# Altium PCB PH10EA2332-1.PcbDoc
Units mm, origin at the board's own origin, x right, y up, seen from the top; angles counter-clockwise.
Board outline 32 x 23 mm, 2 copper layers (Top Layer, Bottom Layer), stack 1.001 mm thick; 25 components, 20 nets, 77 pads, 766 vias.
Unrouted connection lines stored in the file: 2.
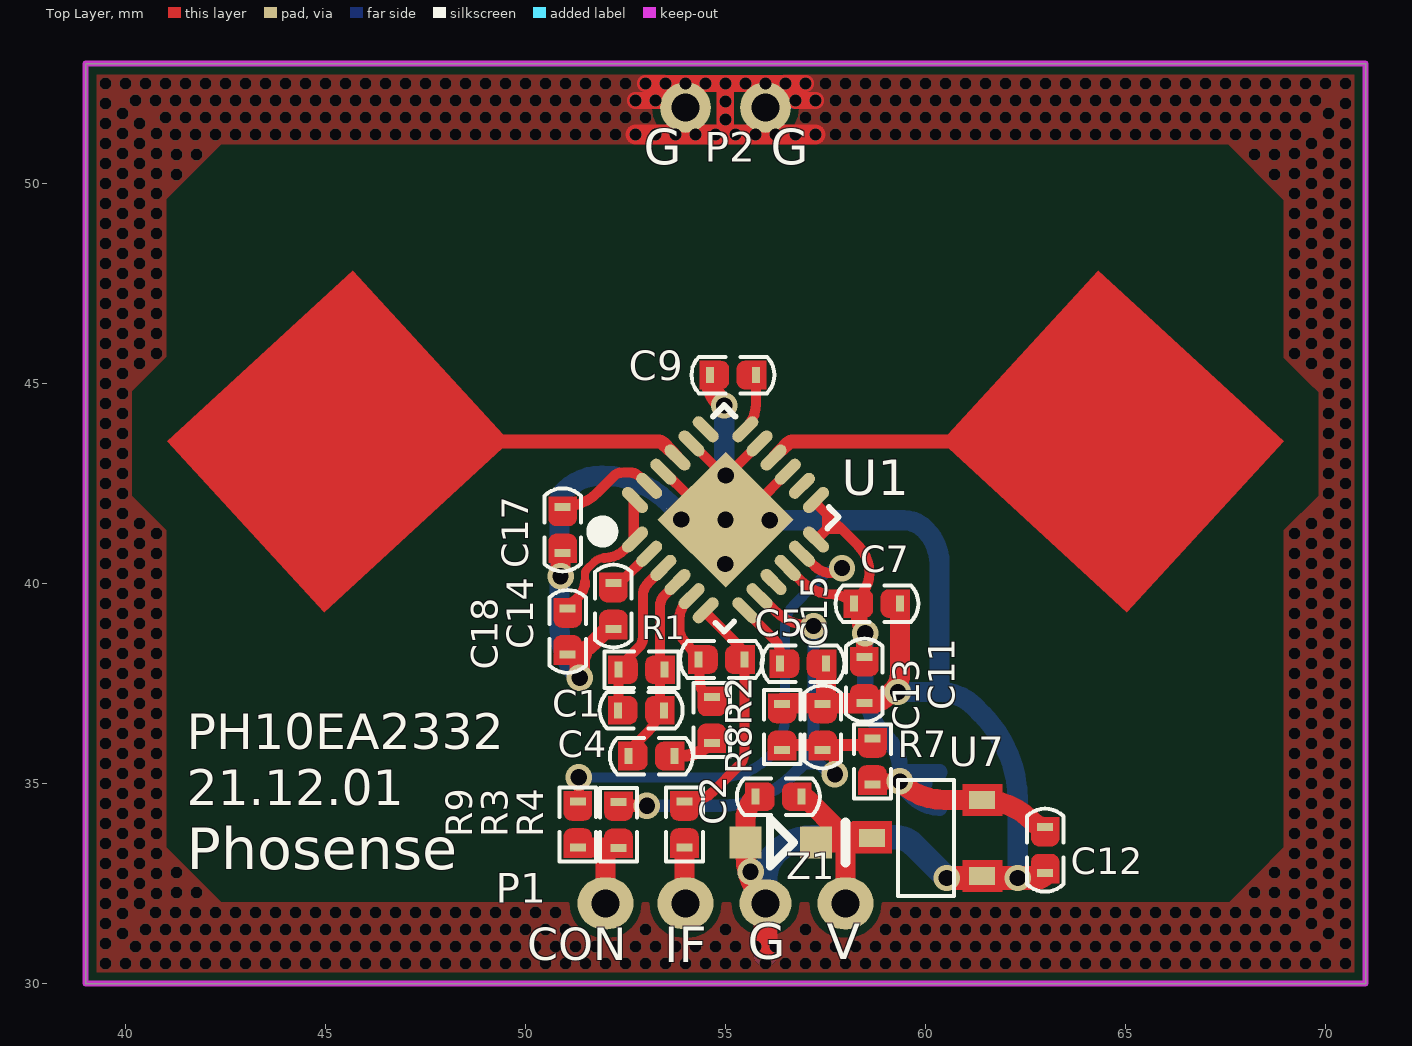
[diagram p0: Top Layer view]
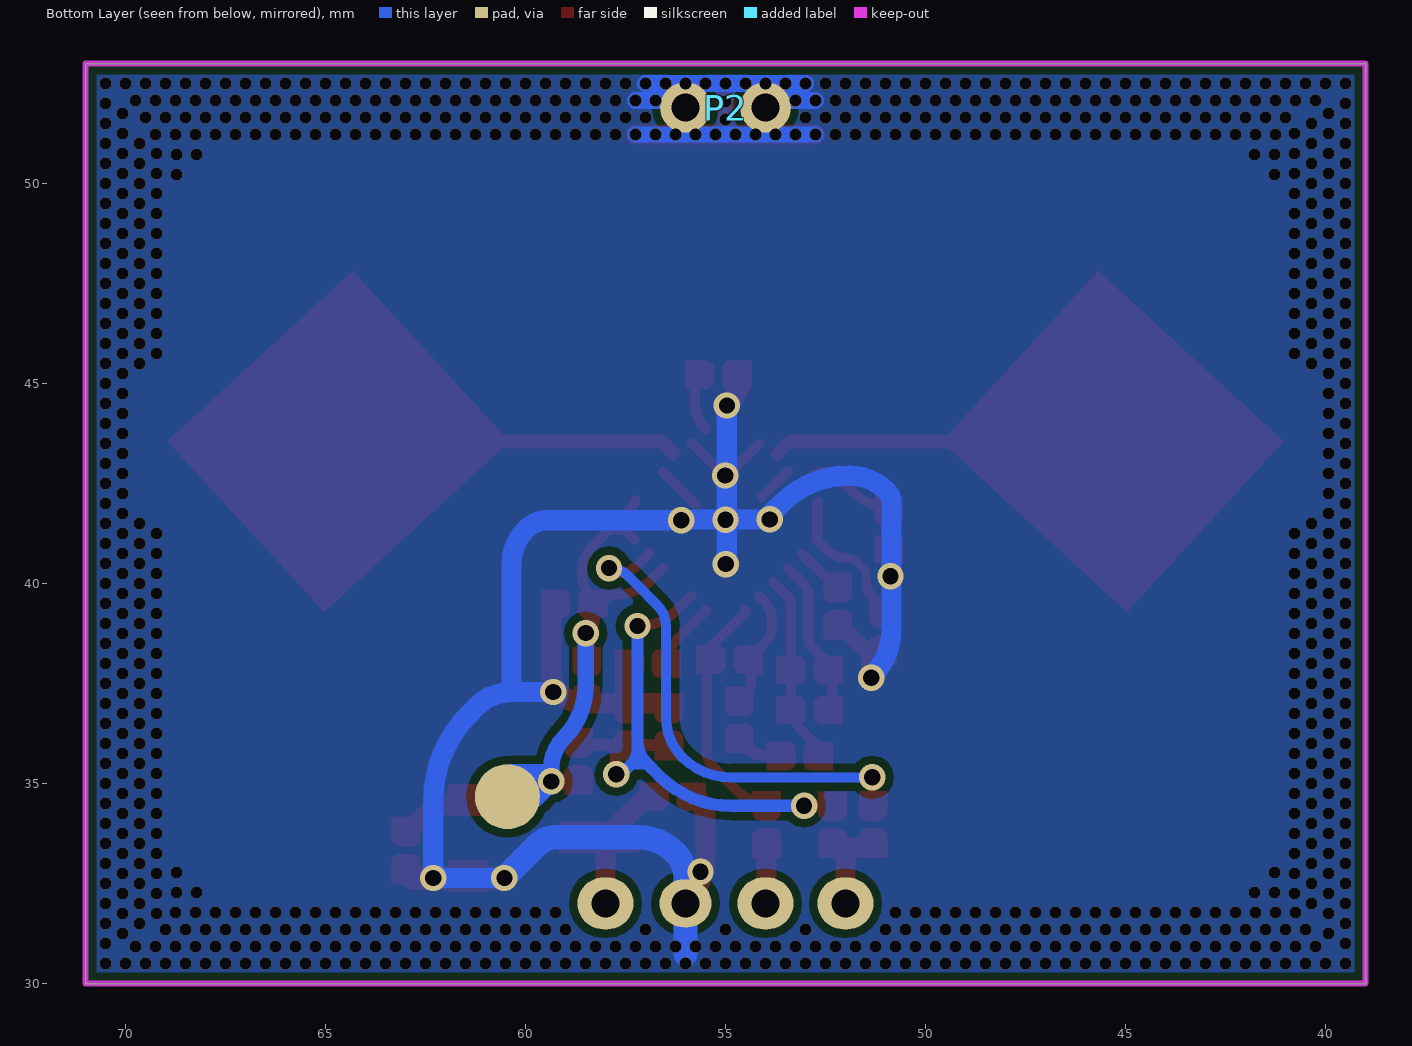
[diagram p1: Bottom Layer view, seen from below]

## Layer stack, top to bottom
Top Layer: signal copper 0.0356
Dielectric: core 0.93, FR-4, Dk 4.8
Bottom Layer: signal copper 0.0356

## Board outline
39,30 39,53 71,53 71,30

## Design rules (kind name [scope] priority, off if disabled: settings)
Clearance [All] p1: gap=0.203
ComponentClearance [All] p1: gap=0.254 collisioncheckmode=3 verticalgap=0.254
PolygonConnect [All] p1: connectstyle=Direct reliefconductorwidth=0.254 reliefentries=4 polygonreliefangle="90 Angle"
RoutingVias [All] p1: holewidth=0.711 width=1.27 viastyle="Through Hole" minholewidth=0.711 minwidth=1.27 maxholewidth=0.711 maxwidth=1.27
SolderMaskExpansion [All] p1: expansion=0.102
TestPointUsage [All] p1: valid=0 allowmultiple=FALSE
Testpoint [All] p1: side=15 testpointundercomponent=TRUE minsize=1.016 maxsize=2.54 preferedsize=1.524 minholesize=0 maxholesize=1.016 preferedholesize=0.813 testpointgrid=0.025 style=1023 order=0-112345678
Width [All] p1: maxlimit=1.016 minlimit=0.254 preferedwidth=0.254 minimp=50.000000 maximp=50.000000 favimp=50.000000
18 further rules are at their usual default settings.

## Components (designator, comment, footprint, x,y, rotation, side; value= is the part's Value field where it differs from the comment)
C1 "5nF" C0402 53.467,36.83 r180 top (schematic designator C16)
C2 "10uF" C0402 56.896,34.671 r180 top (schematic designator C16)
C4 "10uF" C0402 53.721,35.687 r180 top (schematic designator C16)
C5 "5nF" C0402 55.474,38.1 r180 top (schematic designator C16)
C7 "100nF" C0402 59.36,39.497 r180 top (schematic designator C16)
C9 "10uF" C0402 54.61,45.212 r0 top (schematic designator C16)
C11 "10uF" C0402 58.471,37.008 r90 top (schematic designator C16)
C12 "10uF" C0402 62.992,33.909 r270 top (schematic designator C16)
C13 "10uF" C0402 57.429,35.839 r90 top (schematic designator C16)
C14 "10uF" C0402 52.197,38.862 r90 top (schematic designator C16)
C15 "10uF" C0402 56.363,37.998 r0 top (schematic designator C16)
C17 "10uF" C0402 50.927,40.767 r90 top (schematic designator C16)
C18 "100pF" C0402 51.054,38.227 r90 top (schematic designator C16)
P1 "PH2.0-4P" PH2.0-5P 58,32.004 r180 top
P2 "SIP2.0-2P" SIP2.0-2P 56,51.9 r180 bottom (schematic designator P1)
R1 "100k" R0402 52.324,37.846 r0 top (schematic designator R14)
R2 "5.1k" R0402 54.661,36.017 r90 top (schematic designator R14)
R3 "NC" R0402 52.324,34.544 r270 top (schematic designator R14)
R4 "1k" R0402 53.975,33.401 r90 top (schematic designator R14)
R7 "12k" R0402 58.674,34.976 r90 top (schematic designator R14)
R8 "10k" R0402 56.413,35.839 r90 top (schematic designator R14)
R9 "0" R0402 51.308,33.401 r90 top (schematic designator R14)
U1 "XBR8161" QFN24 56.556,42.866 r45 top (schematic designator QFN-1)
U7 "ME6216A33M3G" SOT-23-L 61.417,32.69 r180 top (schematic designator U6)
Z1 "ESD5Z5.0T1G" SOD-523 55.499,33.528 r0 top

## Footprints (in the part's own frame and the unit in brackets; to place one, negate y for a bottom-side part, rotate by r counter-clockwise, add the part's x,y. Pads: shape width x height; smd on the part's side, far side on the other; paste and mask are expansions set on the pad)
C0402 [mm]
  rect 0.2x0.4 smd: 1(0,0) 2(1.15,0)
  Top Layer region: 0.873,0.352 0.873,-0.351 1.401,-0.351 1.401,0.352
  Top Layer region: -0.252,0.352 -0.252,-0.351 0.276,-0.351 0.353,-0.336 0.418,-0.292 0.461,-0.227 0.477,-0.151 0.477,-0.151 0.477,0.152 0.461,0.228 0.418,0.293 0.353,0.337 0.276,0.352 0.276,0.352
  Top Layer region: 1.402,-0.352 1.402,0.351 0.874,0.351 0.797,0.336 0.732,0.292 0.689,0.227 0.673,0.151 0.673,0.151 0.673,-0.152 0.689,-0.228 0.732,-0.293 0.797,-0.337 0.874,-0.352 0.874,-0.352
  silkscreen extent -0.46,-0.46 1.61,0.46, body extent 0.08,-0.3 1.08,0.3, height 0.2
PH2.0-5P [mm]
  oval 1.402x1.302 hole 0.7: 1(0,0) 3(4,0)
  oval 1.3x1.2 hole 0.7: 2(2,0)
  oval 1.402x1.3 hole 0.7: 4(6,0)
QFN24 [mm]
  oval 0.8x0.3 smd: 1(-3.95,1.45) 2(-3.95,0.95) 3(-3.95,0.45) 4(-3.95,-0.05) 5(-3.95,-0.55) 6(-3.95,-1.05) 13(-0.05,-1.05) 14(-0.05,-0.55) 15(-0.05,-0.05) 16(-0.05,0.45) 17(-0.05,0.95) 18(-0.05,1.45)
  oval 0.3x0.8 smd: 7(-3.25,-1.75) 8(-2.75,-1.75) 9(-2.25,-1.75) 10(-1.75,-1.75) 11(-1.25,-1.75) 12(-0.75,-1.75) 19(-0.75,2.15) 20(-1.25,2.15) 21(-1.75,2.15) 22(-2.25,2.15) 23(-2.75,2.15) 24(-3.25,2.15)
  rect 2.4x2.4 smd: 25(-2,0.2)
  silkscreen extent -4.59,-1.75 0.05,2.37
R0402 [mm]
  rect 0.2x0.4 smd: 1(0,0) 2(1.15,0)
  Top Layer region: 0.873,0.352 0.873,-0.351 1.401,-0.351 1.401,0.352
  Top Layer region: -0.252,0.352 -0.252,-0.351 0.276,-0.351 0.353,-0.336 0.418,-0.292 0.461,-0.227 0.477,-0.151 0.477,-0.151 0.477,0.152 0.461,0.228 0.418,0.293 0.353,0.337 0.276,0.352 0.276,0.352
  Top Layer region: 1.402,-0.352 1.402,0.351 0.874,0.351 0.797,0.336 0.732,0.292 0.689,0.227 0.673,0.151 0.673,0.151 0.673,-0.152 0.689,-0.228 0.732,-0.293 0.797,-0.337 0.874,-0.352 0.874,-0.352
  silkscreen extent -0.35,-0.46 1.5,0.46, body extent 0.12,-0.26 1.12,0.24, height 0.35
SIP2.0-2P [mm]
  round 1.27 hole 0.7: 1(0,0) 2(2,0)
SOD-523 [mm]
  rect 0.8x0.8 smd: A(0,0) K(1.76,0)
  silkscreen extent 0.62,-0.6 2.5,0.6, body extent -0.47,-0.63 2.23,0.62, height 1.1
SOT-23-L [mm]
  rect 0.65x0.45 smd: 1(0,0) 2(0,-1.9) 3(2.757,-0.95)
  Top Layer region: -0.507,-0.398 0.496,-0.398 0.496,0.405 -0.507,0.405
  Top Layer region: -0.507,-2.303 0.496,-2.303 0.496,-1.5 -0.507,-1.5
  Top Layer region: 2.254,-1.367 3.257,-1.367 3.257,-0.564 2.254,-0.564
  silkscreen extent 0.71,-2.4 2.11,0.5, body extent 0.17,-2.44 2.67,0.56, height 1.05

## Part data
C1 C2 C4 C5 C7 C9 C11 C12 C13 C14 C15 C17 C18: library part Cap, "Capacitor"
P1: library part CON5, "Connector"
P2: library part "Header 2", "Header, 2-Pin"
R1 R2 R3 R4 R7 R8 R9: library part Res2, "Resistor"
U1: library part XBR1000
U7: library part SSP6206
Z1: library part "D Zener", "Zener Diode"

## Free pads (board coordinates)
  round 1.626 smd far side: 0(60.452,34.671)

## Via types
v1: diameter 0.3, hole 0.3, Top Layer to Bottom Layer, tented both sides, 747 vias
v2: diameter 0.66, hole 0.406, Top Layer to Bottom Layer, tented both sides, 19 vias

## Nets (pads, with @x,y where several pads share a name; then routed paths per layer and width w, separated by ;. In a path a pad name is that pad's centre, name@x,y a point inside that pad or via, vN(x,y) a via of type N, cw(c..) or ccw(c..) an arc to the next point about the centre after c; other vN are vias at no path point)
3.3V: C7.2 C11.2 C12.1 pad.0 R7.1 U1.10 U1.12 U1.13 U7.2 | length 19.2
  Top Layer w0.254: U1.10 cw(c56.556,40.379) 56.564,40.387 56.885,40.067 ccw(c57.709,40.891) 57.709,39.726 cw(c57.709,39.191) 58.087,39.569 ; U1.12 ccw(c57.263,41.124) 57.281,41.106 57.719,41.544 ; U1.13 ccw(c57.474,42.088) 57.325,41.939 58.31,40.953 cw(c57.617,40.259) 58.598,40.259 cw(c57.818,40.259) 58.369,39.707 ; 57.533,41.73 cw(c57.524,41.72) 57.537,41.72 57.537,41.362 57.9,41.362 ; 57.9,41.362 cw(c57.9,41.36) 57.902,41.361 ccw(c57.9,41.36) 57.9,41.362
  Top Layer w0.305: 58.344,39.37 58.344,39.646 ; 58.344,39.646 cw(c58.431,39.646) 58.369,39.707 ccw(c58.431,39.646) 58.344,39.646
  Top Layer w0.406: 58.344,39.37 58.344,39.128 ccw(c58.864,39.128) v2(58.496,38.76) ccw(c58.558,38.699) 58.471,38.699 C11.2 ; R7.1 cw(c58.858,34.792) 58.858,35.052 v2(59.36,35.052)
  Top Layer w0.508: v2(59.36,35.052) ccw(c60.476,36.168) 60.476,34.59 U7.2 cw(c61.417,32.861) 62.64,34.083 62.688,34.035 ccw(c62.992,34.338) C12.1
  Bottom Layer w0.406: v2(58.496,38.76) 58.496,37.455 ccw(c60.367,37.455) 59.044,36.133 cw(c58.282,35.37) v2@59.36,35.37 ; v2@59.393,35.281 pad.0@60.35,35.281 ; v2@59.393,35.357 cw(c59.393,35.403) v2@59.36,35.37 ; pad.0@59.969,35.001 ccw(c59.847,34.879) 59.847,35.052 v2(59.36,35.052) ; pad.0@60.35,34.395 cw(c60.35,35.334) 59.687,34.67 59.398,34.959 cw(c59.492,35.052) v2(59.36,35.052) ; v2(59.36,35.052) v2@59.36,35.37
3.6~5V: C2.1 P1.1 U7.3 Z1.K | length 5.4
  Top Layer w0.508: C2.1 cw(c56.896,34.487) 57.026,34.617 57.855,33.788 ; Z1.K 58.39,33.528 ccw(c58.39,33.91) U7.3 ccw(c58.302,33.282) 58.302,33.788 57.855,33.788 ; 57.937,33.528 cw(c57.786,33.377) 58,33.377 P1.1 ; 57.963,33.528 ccw(c57.595,33.528) 57.855,33.788
GND: C2.2 C7.1 C9.1 C11.1 C12.2 C13.2 C14.1 C15.2 C17.1 C18.1 R8.2 U1.15 U1.17 U1.20 U1.22 U1.25 U7.1 Z1.A | length 58.7
  Top Layer w0.254: U1.22 53.471,42.795 U1.25@54.102,42.164 ; U1.20 54.161,43.502 U1.25@54.962,42.701 ; U1.25@55.045,42.701 55.847,43.502 U1.17 ; U1.25@55.728,41.961 56.556,42.789 U1.15
  Top Layer w0.406: C18.1@51.003,38.227 ccw(c51.003,39.212) 51.7,38.516 52.046,38.862 C14.1
  Top Layer w0.508: v2(50.876,40.183) 50.876,40.644 cw(c51.05,40.644) C17.1 ; v2(51.359,37.643) 51.359,38.122 cw(c51.524,38.122) 51.407,38.239 ; C9.1 ccw(c55.591,45.212) 54.897,44.518 v2(54.966,44.45) ; C2.2 ccw(c56.342,34.075) 55.499,34.075 Z1.A 55.499,33.214 ccw(c57.21,33.214) 56,32.004 ; R8.2@56.363,36.989 cw(c56.407,36.945) 56.407,37.008 58.59,37.008 ccw(c58.59,37.702) 59.08,37.211 59.183,37.314 ccw(c58.757,37.74) 59.36,37.74 C7.1 ; C15.2 57.513,37.052 ccw(c57.575,37.052) C13.2@57.531,37.008
  Top Layer w0.61: 55.968,32.036 56,32.004 56,31.005 ccw(c56.024,31.005) 56.007,30.988 ; v2(60.528,32.639) 62.702,32.639 ccw(c62.702,33.049) C12.2
  Bottom Layer w0.508: v2(51.359,37.643) cw(c52.585,38.869) 50.851,38.869 50.851,42.01 cw(c51.284,42.01) 50.978,42.316 cw(c51.898,41.397) 51.898,42.697 51.918,42.697 cw(c51.918,40.306) 53.609,41.997 53.813,41.793 cw(c53.622,41.602) v2(53.892,41.602) 56.066,41.602 cw(c56.066,41.543) v2(56.108,41.584) 59.442,41.584 cw(c59.442,40.814) 59.987,41.359 cw(c59.111,40.482) 60.35,40.482 60.35,37.338 ; v2(54.966,44.45) 54.966,40.547 ccw(c55.053,40.547) v2(54.991,40.485) ; v2(59.309,37.287) 60.35,37.287 cw(c60.35,36.061) 61.218,36.928 61.408,36.737 cw(c59.24,34.569) 62.306,34.569 v2(62.306,32.639) v2(60.528,32.639)
  Bottom Layer w0.61: 56,30.734 56,32.644 cw(c56.891,32.644) 56.261,33.274 cw(c57.181,32.354) 57.181,33.655 59.258,33.655 cw(c59.258,33.042) 59.692,33.475 v2(60.528,32.639)
  other v1: 39.5,30.5 40,30.5 40.5,30.5 41,30.5 41.5,30.5 42,30.5 42.5,30.5 43,30.5 43.5,30.5 44,30.5 44.5,30.5 45,30.5 45.5,30.5 46,30.5 46.5,30.5 47,30.5 47.5,30.5 48,30.5 48.5,30.5 49,30.5 49.5,30.5 50,30.5 50.5,30.5 51,30.5 51.5,30.5 52,30.5 52.5,30.5 53,30.5 53.5,30.5 54,30.5 54.5,30.5 55,30.5 55.5,30.5 56,30.5 56.5,30.5 57,30.5 57.5,30.5 58,30.5 58.5,30.5 59,30.5 59.5,30.5 60,30.5 60.5,30.5 61,30.5 61.5,30.5 62,30.5 62.5,30.5 63,30.5 63.5,30.5 64,30.5 64.5,30.5 65,30.5 65.5,30.5 66,30.5 66.5,30.5 67,30.5 67.5,30.5 68,30.5 68.5,30.5 69,30.5 69.5,30.5 70,30.5 70.5,30.5 40.25,30.925 40.75,30.925 41.25,30.925 41.75,30.925 42.25,30.925 42.75,30.925 43.25,30.925 43.75,30.925 44.25,30.925 44.75,30.925 45.25,30.925 45.75,30.925 46.25,30.925 46.75,30.925 47.25,30.925 47.75,30.925 48.25,30.925 48.75,30.925 49.25,30.925 49.75,30.925 50.25,30.925 50.75,30.925 51.25,30.925 51.75,30.925 52.25,30.925 52.75,30.925 53.25,30.925 53.75,30.925 54.25,30.925 54.75,30.925 55.25,30.925 55.75,30.925 56.25,30.925 56.75,30.925 57.25,30.925 57.75,30.925 58.25,30.925 58.75,30.925 59.25,30.925 59.75,30.925 60.25,30.925 60.75,30.925 61.25,30.925 61.75,30.925 62.25,30.925 62.75,30.925 63.25,30.925 63.75,30.925 64.25,30.925 64.75,30.925 65.25,30.925 65.75,30.925 66.25,30.925 66.75,30.925 67.25,30.925 67.75,30.925 68.25,30.925 68.75,30.925 69.25,30.925 69.75,30.925 39.5,31 70.5,31 39.925,31.25 70.075,31.25 40.5,31.35 41,31.35 41.5,31.35 42,31.35 42.5,31.35 43,31.35 43.5,31.35 44,31.35 44.5,31.35 45,31.35 45.5,31.35 46,31.35 46.5,31.35 47,31.35 47.5,31.35 48,31.35 48.5,31.35 49,31.35 49.5,31.35 50,31.35 50.5,31.35 51,31.35 53,31.35 55,31.35 57,31.35 59,31.35 59.5,31.35 60,31.35 60.5,31.35 61,31.35 61.5,31.35 62,31.35 62.5,31.35 63,31.35 63.5,31.35 64,31.35 64.5,31.35 65,31.35 65.5,31.35 66,31.35 66.5,31.35 67,31.35 67.5,31.35 68,31.35 68.5,31.35 69,31.35 39.5,31.5 69.65,31.5 70.5,31.5 39.925,31.75 69.225,31.75 70.075,31.75 40.75,31.775 41.25,31.775 41.75,31.775 42.25,31.775 42.75,31.775 43.25,31.775 43.75,31.775 44.25,31.775 44.75,31.775 45.25,31.775 45.75,31.775 46.25,31.775 46.75,31.775 47.25,31.775 47.75,31.775 48.25,31.775 48.75,31.775 49.25,31.775 49.75,31.775 50.25,31.775 50.75,31.775 59.25,31.775 59.75,31.775 60.25,31.775 60.75,31.775 61.25,31.775 61.75,31.775 62.25,31.775 62.75,31.775 63.25,31.775 63.75,31.775 64.25,31.775 64.75,31.775 65.25,31.775 65.75,31.775 66.25,31.775 66.75,31.775 67.25,31.775 67.75,31.775 68.25,31.775 68.75,31.775 39.5,32 40.35,32 69.65,32 70.5,32 39.925,32.25 40.775,32.25 69.225,32.25 70.075,32.25 41.275,32.275 41.775,32.275 68.225,32.275 68.725,32.275 39.5,32.5 40.35,32.5 69.65,32.5 70.5,32.5 39.925,32.75 40.775,32.75 69.225,32.75 70.075,32.75 41.275,32.775 68.725,32.775 39.5,33 40.35,33 69.65,33 70.5,33 39.925,33.25 40.775,33.25 69.225,33.25 70.075,33.25 39.5,33.5 40.35,33.5 69.65,33.5 70.5,33.5 39.925,33.75 40.775,33.75 69.225,33.75 70.075,33.75 39.5,34 40.35,34 69.65,34 70.5,34 39.925,34.25 40.775,34.25 69.225,34.25 70.075,34.25 39.5,34.5 40.35,34.5 69.65,34.5 70.5,34.5 39.925,34.75 40.775,34.75 69.225,34.75 70.075,34.75 39.5,35 40.35,35 69.65,35 70.5,35 39.925,35.25 40.775,35.25 69.225,35.25 70.075,35.25 39.5,35.5 40.35,35.5 69.65,35.5 70.5,35.5 39.925,35.75 40.775,35.75 69.225,35.75 70.075,35.75 39.5,36 40.35,36 69.65,36 70.5,36 39.925,36.25 40.775,36.25 69.225,36.25 70.075,36.25 39.5,36.5 40.35,36.5 69.65,36.5 70.5,36.5 39.925,36.75 40.775,36.75 69.225,36.75 70.075,36.75 39.5,37 40.35,37 69.65,37 70.5,37 39.925,37.25 40.775,37.25 69.225,37.25 70.075,37.25 39.5,37.5 40.35,37.5 69.65,37.5 70.5,37.5 39.925,37.75 40.775,37.75 69.225,37.75 70.075,37.75 39.5,38 40.35,38 69.65,38 70.5,38 39.925,38.25 40.775,38.25 69.225,38.25 70.075,38.25 39.5,38.5 40.35,38.5 69.65,38.5 70.5,38.5 39.925,38.75 40.775,38.75 69.225,38.75 70.075,38.75 39.5,39 40.35,39 69.65,39 70.5,39 39.925,39.25 40.775,39.25 69.225,39.25 70.075,39.25 39.5,39.5 40.35,39.5 69.65,39.5 70.5,39.5 39.925,39.75 40.775,39.75 69.225,39.75 70.075,39.75 39.5,40 40.35,40 69.65,40 70.5,40 39.925,40.25 40.775,40.25 69.225,40.25 70.075,40.25 39.5,40.5 40.35,40.5 69.65,40.5 70.5,40.5 39.925,40.75 40.775,40.75 69.225,40.75 70.075,40.75 39.5,41 40.35,41 69.65,41 70.5,41 39.925,41.25 40.775,41.25 69.225,41.25 70.075,41.25 39.5,41.5 40.35,41.5 69.65,41.5 70.5,41.5 39.925,41.75 70.075,41.75 39.5,42 70.5,42 39.925,42.25 70.075,42.25 39.5,42.5 70.5,42.5 39.925,42.75 70.075,42.75 39.5,43 70.5,43 39.925,43.25 70.075,43.25 39.5,43.5 70.5,43.5 39.925,43.75 70.075,43.75 39.5,44 70.5,44 39.925,44.25 70.075,44.25 39.5,44.5 70.5,44.5 39.925,44.75 70.075,44.75 39.5,45 70.5,45 39.925,45.25 70.075,45.25 39.5,45.5 40.35,45.5 69.65,45.5 70.5,45.5 39.925,45.75 40.775,45.75 69.225,45.75 70.075,45.75 39.5,46 40.35,46 69.65,46 70.5,46 39.925,46.25 40.775,46.25 69.225,46.25 70.075,46.25 39.5,46.5 40.35,46.5 69.65,46.5 70.5,46.5 39.925,46.75 40.775,46.75 69.225,46.75 70.075,46.75 39.5,47 40.35,47 69.65,47 70.5,47 39.925,47.25 40.775,47.25 69.225,47.25 70.075,47.25 39.5,47.5 40.35,47.5 69.65,47.5 70.5,47.5 39.925,47.75 40.775,47.75 69.225,47.75 70.075,47.75 39.5,48 40.35,48 69.65,48 70.5,48 39.925,48.25 40.775,48.25 69.225,48.25 70.075,48.25 39.5,48.5 40.35,48.5 69.65,48.5 70.5,48.5 39.925,48.75 40.775,48.75 69.225,48.75 70.075,48.75 39.5,49 40.35,49 69.65,49 70.5,49 39.925,49.25 40.775,49.25 69.225,49.25 70.075,49.25 39.5,49.5 40.35,49.5 69.65,49.5 70.5,49.5 39.925,49.75 40.775,49.75 69.225,49.75 70.075,49.75 39.5,50 40.35,50 69.65,50 70.5,50 41.275,50.225 68.725,50.225 39.925,50.25 40.775,50.25 69.225,50.25 70.075,50.25 39.5,50.5 40.35,50.5 69.65,50.5 70.5,50.5 41.275,50.725 41.775,50.725 68.225,50.725 68.725,50.725 39.925,50.75 40.775,50.75 69.225,50.75 70.075,50.75 39.5,51 40.35,51 69.65,51 70.5,51 41.25,51.225 41.75,51.225 42.25,51.225 42.75,51.225 43.25,51.225 43.75,51.225 44.25,51.225 44.75,51.225 45.25,51.225 45.75,51.225 46.25,51.225 46.75,51.225 47.25,51.225 47.75,51.225 48.25,51.225 48.75,51.225 49.25,51.225 49.75,51.225 50.25,51.225 50.75,51.225 51.25,51.225 51.75,51.225 52.25,51.225 52.75,51.225 53.25,51.225 53.75,51.225 54.25,51.225 54.75,51.225 55.25,51.225 55.75,51.225 56.25,51.225 56.75,51.225 57.25,51.225 57.75,51.225 58.25,51.225 58.75,51.225 59.25,51.225 59.75,51.225 60.25,51.225 60.75,51.225 61.25,51.225 61.75,51.225 62.25,51.225 62.75,51.225 63.25,51.225 63.75,51.225 64.25,51.225 64.75,51.225 65.25,51.225 65.75,51.225 66.25,51.225 66.75,51.225 67.25,51.225 67.75,51.225 68.25,51.225 68.75,51.225 69.25,51.225 39.925,51.25 40.775,51.25 70.075,51.25 39.5,51.5 40.35,51.5 70.5,51.5 55,51.6 41,51.65 41.5,51.65 42,51.65 42.5,51.65 43,51.65 43.5,51.65 44,51.65 44.5,51.65 45,51.65 45.5,51.65 46,51.65 46.5,51.65 47,51.65 47.5,51.65 48,51.65 48.5,51.65 49,51.65 49.5,51.65 50,51.65 50.5,51.65 51,51.65 51.5,51.65 52,51.65 52.5,51.65 53,51.65 57,51.65 57.5,51.65 58,51.65 58.5,51.65 59,51.65 59.5,51.65 60,51.65 60.5,51.65 61,51.65 61.5,51.65 62,51.65 62.5,51.65 63,51.65 63.5,51.65 64,51.65 64.5,51.65 65,51.65 65.5,51.65 66,51.65 66.5,51.65 67,51.65 67.5,51.65 68,51.65 68.5,51.65 69,51.65 69.5,51.65 39.925,51.75 70.075,51.75 39.5,52 70.5,52 55,52.05 40.25,52.075 40.75,52.075 41.25,52.075 41.75,52.075 42.25,52.075 42.75,52.075 43.25,52.075 43.75,52.075 44.25,52.075 44.75,52.075 45.25,52.075 45.75,52.075 46.25,52.075 46.75,52.075 47.25,52.075 47.75,52.075 48.25,52.075 48.75,52.075 49.25,52.075 49.75,52.075 50.25,52.075 50.75,52.075 51.25,52.075 51.75,52.075 52.25,52.075 52.75,52.075 53.25,52.075 56.75,52.075 57.25,52.075 57.75,52.075 58.25,52.075 58.75,52.075 59.25,52.075 59.75,52.075 60.25,52.075 60.75,52.075 61.25,52.075 61.75,52.075 62.25,52.075 62.75,52.075 63.25,52.075 63.75,52.075 64.25,52.075 64.75,52.075 65.25,52.075 65.75,52.075 66.25,52.075 66.75,52.075 67.25,52.075 67.75,52.075 68.25,52.075 68.75,52.075 69.25,52.075 69.75,52.075 39.5,52.5 40,52.5 40.5,52.5 41,52.5 41.5,52.5 42,52.5 42.5,52.5 43,52.5 43.5,52.5 44,52.5 44.5,52.5 45,52.5 45.5,52.5 46,52.5 46.5,52.5 47,52.5 47.5,52.5 48,52.5 48.5,52.5 49,52.5 49.5,52.5 50,52.5 50.5,52.5 51,52.5 51.5,52.5 52,52.5 52.5,52.5 53,52.5 53.5,52.5 54,52.5 54.5,52.5 55,52.5 55.5,52.5 56,52.5 56.5,52.5 57,52.5 57.5,52.5 58,52.5 58.5,52.5 59,52.5 59.5,52.5 60,52.5 60.5,52.5 61,52.5 61.5,52.5 62,52.5 62.5,52.5 63,52.5 63.5,52.5 64,52.5 64.5,52.5 65,52.5 65.5,52.5 66,52.5 66.5,52.5 67,52.5 67.5,52.5 68,52.5 68.5,52.5 69,52.5 69.5,52.5 70,52.5 70.5,52.5
  other v2: 55.626,32.791 55,41.593 55.009,42.701
IF: P1.3 R4.1 | length 1.8
  Top Layer w0.508: P1.3@53.848,32.371 ccw(c54.367,32.371) P1.3 ; P1.3@53.975,32.004 R4.1
IFCAP: C17.2 U1.23 | length 2.6
  Top Layer w0.254: C17.2 ccw(c50.927,43.16) 51.806,42.281 52.219,42.694 cw(c52.411,42.503) 52.411,42.774 52.603,42.774 cw(c52.603,42.406) 52.864,42.666 53.086,42.444 ccw(c53.091,42.449) U1.23
IFON: C18.2 U1.1 U1.24 | length 3.6
  Top Layer w0.203: 51.486,40.03 51.486,40.238 ; 51.968,40.64 ccw(c51.968,40.272) 51.708,40.532 51.537,40.361 ; 51.486,40.238 cw(c51.659,40.238) 51.537,40.361 ; 51.486,40.238 cw(c51.659,40.238) 51.537,40.361
  Top Layer w0.254: 51.054,39.504 ccw(c51.054,39.745) 51.225,39.575 51.348,39.698 ccw(c51.016,40.03) 51.486,40.03 ; 51.968,40.64 ccw(c51.968,41.376) 52.489,40.856 52.723,41.09 cw(c52.734,41.08) 52.734,41.094 U1.1 cw(c52.815,41.176) 52.705,41.176 U1.24@52.705,42.037
NetC4_1: C4.1 R2.1 | length 1
  Top Layer w0.305: C4.1 53.864,35.687 ccw(c53.864,36.814) R2.1
NetP1_4: P1.4 R3.2 R9.1 | length 2.4
  Top Layer w0.305: 51.972,33.406 cw(c51.904,33.338) 52,33.338
  Top Layer w0.508: R9.1 52.307,33.401 cw(c52.307,33.377) R3.2 ; P1.4 52,33.338
OP1INN: C1.2 R1.1 U1.3 | length 4
  Top Layer w0.254: C1.2 ccw(c52.3,36.847) 52.324,36.847 R1.1 cw(c52.447,37.846) 52.36,37.933 52.832,38.405 ccw(c52.587,38.65) 52.934,38.65 52.934,39.7 cw(c53.363,39.7) 53.059,40.004 53.443,40.387 ccw(c53.439,40.391) U1.3
OP1OUT: C1.1 C4.2 R1.2 U1.4 | length 5.1
  Top Layer w0.254: C4.2 52.571,35.807 53.061,36.297 ccw(c52.325,37.032) 53.365,37.032 ; 53.365,36.956 53.365,39.446 cw(c53.733,39.446) 53.473,39.706 53.793,40.027 ccw(c53.783,40.037) U1.4 ; 53.365,37.075 ccw(c53.712,37.075) C1.1
OP2INN: C5.2 R2.2 U1.5 | length 3
  Top Layer w0.254: U1.5 cw(c54.126,39.684) 54.144,39.666 54.028,39.55 ccw(c54.461,39.116) 53.848,39.116 53.848,38.864 ccw(c54.282,38.864) 53.975,38.557 cw(c53.072,37.654) 54.349,37.654 ccw(c55.263,37.654) 54.617,37.008
OP2INP: C15.1 U1.7 | length 1.4
  Top Layer w0.254: U1.7 ccw(c55.512,39.33) 55.5,39.318 56.219,38.599 cw(c55.872,38.252) 56.363,38.252
OP2OUT: C5.1 R4.2 U1.6 | length 6
  Top Layer w0.254: R4.2@54.102,34.551 ccw(c54.102,35.365) 54.678,34.789 55.33,35.442 ccw(c54.983,35.789) 55.474,35.789 C5.1 ccw(c54.983,38.1) 55.33,38.447 U1.6@54.546,39.23 ; U1.6@54.546,39.23 cw(c54.646,39.33) U1.6 ccw(c54.646,39.33) U1.6@54.546,39.23
OPCAP: C14.2 U1.2 | length 1.2
  Top Layer w0.254: C14.2 52.358,40.012 U1.2
PULSE: R9.2 U1.11 | length 12.4
  Top Layer w0.254: R9.2 ccw(c51.247,34.612) 51.333,34.612 v2(51.333,35.154) ; U1.11@56.896,40.767 57.224,40.439 ccw(c57.658,40.872) 57.658,40.259 v2@57.912,40.259
  Bottom Layer w0.254: v2(51.333,35.154) 54.872,35.154 ccw(c54.872,36.852) 56.073,35.651 ccw(c55.066,36.658) 56.49,36.658 56.49,38.938 cw(c57.225,38.938) 56.705,39.459 57.201,39.954 57.435,40.188 cw(c57.912,39.711) v2(57.912,40.386) ; v2@57.825,40.35 cw(c57.912,40.263) v2(57.912,40.386) ; v2@57.876,40.299 ccw(c57.789,40.386) v2(57.912,40.386)
RX2: U1.21
TPVBG: C9.2 U1.18 | length 1.4
  Top Layer w0.254: U1.18 cw(c55.509,43.856) 55.499,43.866 ccw(c54.869,44.496) 55.76,44.496 C9.2
TXN: U1.16
VBPA: U1.14
VCTRL: C13.1 R3.1 R7.2 R8.1 U1.8 | length 15
  Top Layer w0.254: U1.8 cw(c55.849,39.63) 55.887,39.668 56.229,39.325 ccw(c57.164,40.26) 57.164,38.938 v2@57.353,38.938
  Top Layer w0.305: 52.324,34.442 v2(53.035,34.442) ; 56.363,35.966 57.794,35.966 ; v2(57.734,35.23) 57.734,35.823 cw(c57.937,35.823) 57.794,35.966 ; R7.2 cw(c58.289,36.511) 58.289,35.966 57.794,35.966
  Bottom Layer w0.305: v2(53.035,34.442) 54.864,34.442 ccw(c54.864,36.957) 56.642,35.179 56.986,35.523 ; 57.15,35.687 57.517,35.32 ccw(c57.734,35.536) v2(57.734,35.23) ; v2(57.201,38.938) 57.201,36.042 ; 56.986,35.523 ccw(c57.041,35.578) 57.041,35.5 57.337,35.5 cw(c57.666,35.829) 57.201,35.829 57.201,36.042 ; 56.986,35.523 ccw(c56.467,36.042) 57.201,36.042
pads on no net: P1.2 P2.1 P2.2 U1.9 U1.19
copper on no net: | length 23.3
  Top Layer w0.42: 52.75,52.075 53.426,52.075 ccw(c53.426,52.492) 53.721,52.197 53.94,52.416 ccw(c53.857,52.5) 53.975,52.5 ; 56.388,52.5 ccw(c56.54,52.5) 56.433,52.392 56.75,52.075 57.25,52.075
  Top Layer w0.43: 53,52.5 57,52.5 ; 54.991,51.225 54.991,52.5
  Top Layer w0.5: 52.75,51.225 57.25,51.225
  Bottom Layer w0.4: 52.75,51.225 57.25,51.225
  Bottom Layer w0.42: 52.75,52.075 53.299,52.075 ccw(c53.299,52.492) 53.594,52.197 53.597,52.2 ccw(c53.296,52.5) 53.721,52.5 ; 56.134,52.5 ccw(c56.252,52.5) 56.169,52.416 56.388,52.197 ccw(c56.683,52.492) 56.683,52.075 57.25,52.075
  Bottom Layer w0.43: 53,52.5 57,52.5

## Polygon pours and split planes (outlines as drawn)
GND on Top Layer "Bottom Layer-No Net" (solid, remove dead copper, pour order 1000): 39,48.26 41.021,48.26 41.021,49.53 41.021,49.606 41.783,50.368 42.393,50.978 43.053,50.978 67.564,50.978 68.859,49.682 68.961,49.581 68.961,49.098 68.961,45.644 69.596,45.009 69.825,44.78 69.825,44.526 69.825,42.189 68.961,41.326 68.961,40.843 68.961,33.401 68.25,32.69 67.589,32.029 67.412,32.029 42.393,32.029 41.021,33.401 41.021,41.402 41.021,41.326 40.157,42.189 40.157,43.485 40.157,44.806 40.97,45.618 41.021,45.669 41.021,46.66 41.021,48.26 39,48.26 39,30 71,30 71,53 39,53 39,48.26
GND on Bottom Layer "Bottom Layer-No Net" (solid, remove dead copper, pour order 1000): 39,53 71,53 71,30 39,30 39,53

## Keep-outs
Keep-Out Layer:
  the board outline again, w0.152

## Other copper
Top Layer:
  region net RX2: 53.565,43.622 ccw(c53.324,43.382) 53.324,43.722 49.449,43.722 45.677,47.819 41.043,43.552 44.971,39.285 49.421,43.382 53.324,43.382 53.692,43.043 53.904,43.255
  region net TXN: 56.435,43.622 cw(c56.676,43.382) 56.676,43.722 60.551,43.722 64.323,47.819 68.957,43.552 65.029,39.285 60.579,43.382 56.676,43.382 56.308,43.043 56.096,43.255

## Silkscreen, mask and mechanical layers (free items; w line width, h text height)
Top Overlay:
  text "G" at 52.959,50.165 h1.52
  text "G" at 56.134,50.165 h1.52
  text "PH10EA2332" at 41.529,35.56 h1.52
  text "21.12.01" at 41.529,34.163 h1.52
  text "Phosense" at 41.529,32.512 h1.78
  text "CON" at 50.038,30.302 h1.4
  text "G" at 55.551,30.309 h1.52
  text "V" at 57.531,30.302 h1.52
  text "IF" at 53.467,30.226 h1.52